# Altium PCB karmanDB.PcbDoc (part 2 of 2)
Units mil, origin at the board's own origin, x right, y up, seen from the top; angles counter-clockwise.
Board outline 6100 x 3250 mil, 4 copper layers (Top Layer, Ground Plane, Power Plane, Bottom Layer), stack 64.4 mil thick; 205 components, 131 nets, 669 pads, 419 vias.
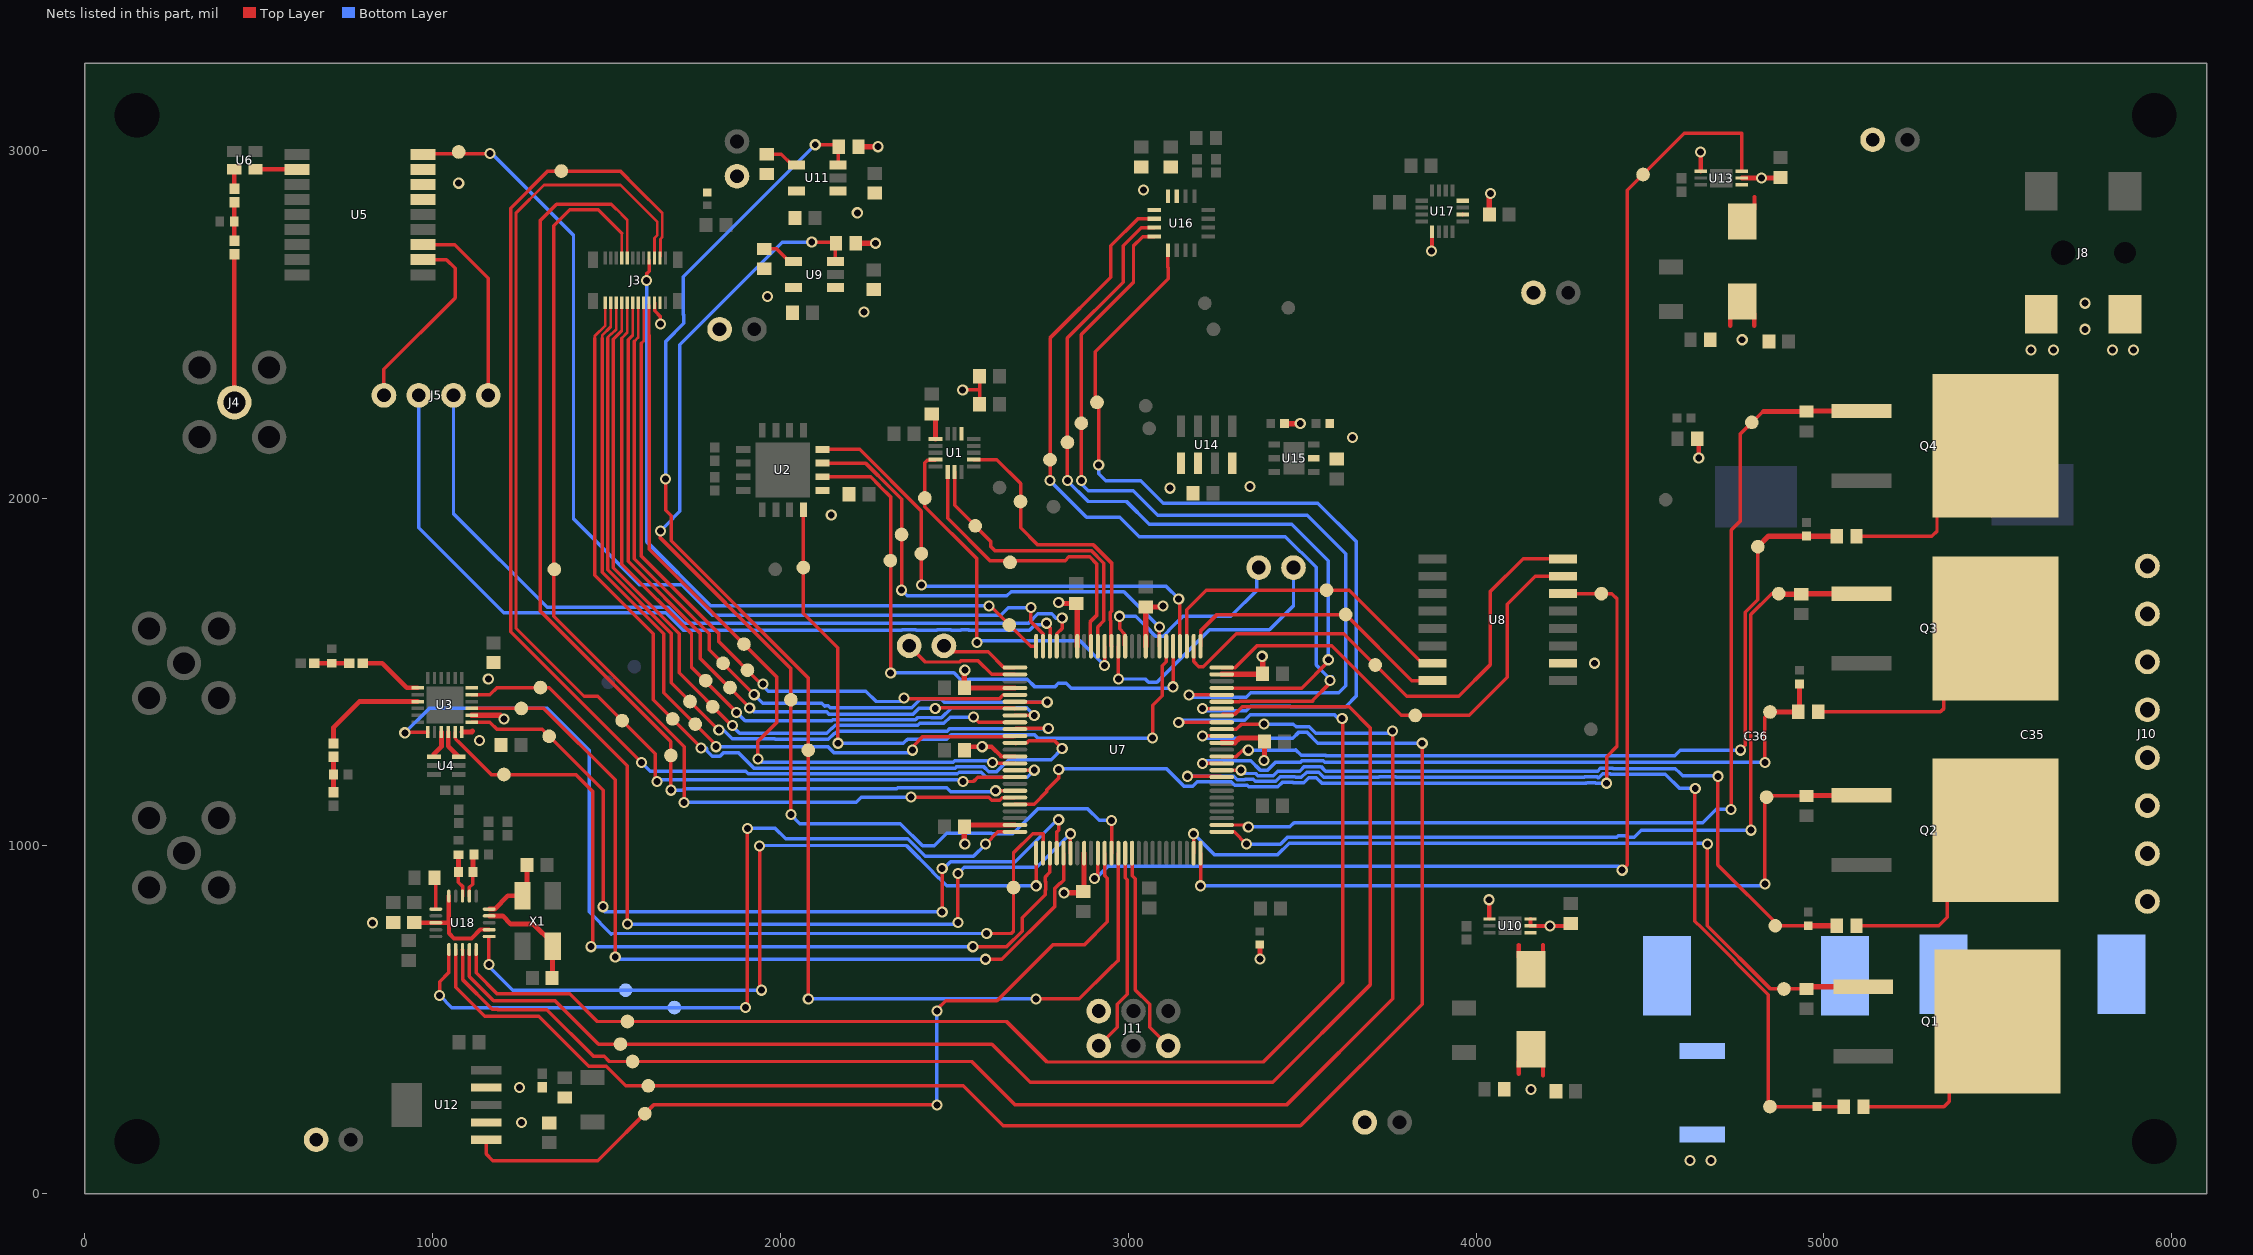
[diagram p4: the nets of this part, all layers, seen from the top]

## Via types
v1: diameter 32, hole 20, Top Layer to Bottom Layer, 416 vias
v2: diameter 30, hole 20, Top Layer to Bottom Layer, 2 vias
v3: diameter 32, hole 20, Top Layer to Bottom Layer, tented top, 1 vias

## Nets (pads, with @x,y where several pads share a name; then routed paths per layer and width w, separated by ;. In a path a pad name is that pad's centre, name@x,y a point inside that pad or via, vN(x,y) a via of type N, cw(c..) or ccw(c..) an arc to the next point about the centre after c; other vN are vias at no path point) (continued)
NetJ4_PIN: J4.PIN Z7.1 | length 425.7
  Top Layer w13.68: J4.PIN@430,2275 Z7.1@430,2700.71
NetL5_2: L5.2 U10.1 | length 69.7
  Top Layer w12: L5.2@4122.52,680.16 4122.52,715 ; L5.2@4192.52,680.16 4192.52,715
NetL6_2: L6.2 U13.1 | length 34.8
  Top Layer w12: L6.2@4800,2830.16 4800,2865
NetL7_1: L7.1 L8.2 U18.13 | length 123.5
  Top Layer w10: L8.2@1074.13,925 1074.13,895.87 1085.94,884.06 U18.13@1085.94,855.51
  Top Layer w14.34: L8.2@1074.13,925 L7.1@1074.13,974.13
NetL8_1: L8.1 L9.1 U18.12 | length 125.1
  Top Layer w10: U18.12@1105.63,855.51 1105.63,880.63 1115,890 L8.1@1115,924.13
  Top Layer w14.34: L8.1@1115,924.13 L8.1@1115.87,925 1115.87,971.73 L9.1@1119.13,975
NetR24_1: R24.1 U18.16 | length 95.4
  Top Layer w10: U18.16@1004.41,818.11 U18.16@1009.17,818.11 R24.1@1009.17,908.74
NetR25_1: R25.1 U9.4 | length 99.9
  Top Layer w10: R25.1@1953.03,2715.98 1989.49,2715.98 2025.63,2679.84 U9.4@2037.99,2679.84
NetR26_1: R26.1 U11.4 | length 97.9
  Top Layer w10: R26.1@1960.9,2988.58 2002.36,2988.58 2033.5,2957.43 U11.4@2045.86,2957.43
NetU3_3: U3.3 U4.4 | length 79.8
  Top Layer w13.68: U4.4@1004.13,1256.18 1004.13,1264.13 1025.16,1285.16 U3.3@1025.16,1327.24
NetU3_4: U3.4 U4.3 | length 83.6
  Top Layer w13.68: U3.4@1044.84,1327.24 1044.84,1286.34 U4.3@1075,1256.18
NetU3_19: U3.19 Z4.1 | length 188.3
  Top Layer w13.68: Z4.1@799.29,1525 Z4.1@801.79,1522.5 ; Z4.1@801.79,1525 855,1525 925.79,1454.21 U3.19@957.24,1454.21
NetU3_21: U3.21 Z1.1 | length 319.1
  Top Layer w13.68: Z1.1@715,1294.29 715,1340 790,1415 957.09,1415 U3.21@957.24,1414.84
NetU5_11: U5.11 U6.2 | length 119.1
  Top Layer w13.68: U6.2@491.02,2945 491.1,2944.92 U5.11@610,2944.92 U5.11@609.92,2945
NetU6_1: U6.1 Z9.2 | length 55.7
  Top Layer w13.68: Z9.2@430,2889.29 U6.1@430,2945
NetZ1_2: Z1.2 Z2.2 Z3.1 | length 101.4
  Top Layer w13.68: Z3.1@715,1154.29 Z2.2@715,1205 Z1.2@715,1255.71
NetZ4_2: Z4.2 Z5.2 Z6.1 | length 101.4
  Top Layer w13.68: Z6.1@659.29,1525 Z5.2@710,1525 Z4.2@760.71,1525
NetZ7_2: Z7.2 Z8.2 Z9.1 | length 111.4
  Top Layer w13.68: Z7.2@430,2739.29 Z8.2@430,2795 Z9.1@430,2850.71
PDI_CLK: J11.6 U7.90 | length 597.4
  Top Layer w10: U7.90@3010.83,979.21 3010.83,914.17 3020,905 3020,585.67 3061.43,544.23 3061.43,478.57 J11.6@3115,425
PDI_DATA: J11.4 U7.89 | length 591
  Top Layer w10: J11.4@2915,425 2968.57,478.57 2968.57,544.23 2997.46,573.12 2997.46,902.26 2991.14,908.57 U7.89@2991.14,979.21
PF4_GPSRST_N: TP67.1 U5.9 U7.49 | length 2907
  Top Layer w10: U5.9@982.72,2988.23 984.49,2990 v1(1165,2990) ; v1(2720,1685) 2720,1645 2754.92,1610.08 U7.49@2754.92,1573.7
  Bottom Layer w10: v1(1165,2990) 1165,2995 1405,2755 1405,1940 1595,1750 1717.37,1750 1804.37,1663 2633,1663 2655,1685 v1(2720,1685)
PF5_MCLK: J3.16 TP65.1 U7.50 | length 2056.6
  Top Layer w10: v1(1615,2625) 1615,2645 1622.26,2652.26 1622.26,2682.9 J3.16@1622.7,2683.34 ; v1(2600,1690) 2603,1690 2719.3,1573.7 U7.50@2735.24,1573.7
  Bottom Layer w10: v1(1615,2625) 1615,1875 1800,1690 v1(2600,1690)
PH0: J3.1 TP45.1 U7.62 | length 2679.4
  Top Layer w8: 1466.19,2460 1466.19,2466.18 1496.5,2496.49 J3.1@1496.5,2560.87
  Top Layer w10: 1466.19,2460 1466.19,1777.81 1634,1610 1634,1419.62 v1(1771.81,1281.81) ; U7.62@2674.21,1296.14 2676.9,1293.46 2676.9,1297.05 2708.87,1297.05 2713.82,1302 2788,1302 v1(2810,1280)
  Bottom Layer w10: v1(1771.81,1281.81) 1785.95,1281.81 1788,1279.76 1788,1273.82 1803.82,1258 1826.18,1258 1835.18,1267 1879.82,1267 1923.82,1223 2502.19,1223 2507.19,1228 2583.82,1228 2598.82,1213 2621.18,1213 2656.18,1248 2778,1248 v1(2810,1280)
PH1: J3.2 TP47.1 U7.61 | length 2313.8
  Top Layer w8: 1487.41,2460 1487.41,2467.6 1512.24,2492.43 J3.2@1512.24,2560.87
  Top Layer w10: 1487.41,2460 1487.41,1786.59 1664,1610 1664,1440.53 1815,1289.53 v1(1815,1285) ; v1(2380,1275) 2380,1285 2408.05,1313.05 2671.43,1313.05 U7.61@2674.21,1315.83
  Bottom Layer w10: v1(1815,1285) 2136.82,1285 2153.82,1268 2373,1268 v1(2380,1275)
PH2: J3.3 TP49.1 U7.60 | length 2445.1
  Top Layer w8: 1503.41,2460 1504.41,2461 1504.41,2462.69 1513.19,2471.48 1514.61,2471.48 1527.99,2484.87 J3.3@1527.99,2560.87
  Top Layer w10: 1503.41,2460 1503.41,1793.22 1686,1610.63 1686,1469.44 v1(1822.72,1332.72) ; U7.60@2674.21,1335.51 2676.99,1338.29 2768.97,1338.29 v1(2770,1337.26)
  Bottom Layer w10: v1(1822.72,1332.72) 1836.86,1332.72 1861.58,1308 1983,1308 1985,1306 2137.82,1306 2153.82,1322 2155.23,1322 2163.23,1330 2479.14,1330 2485.14,1336 2756.74,1336 2762.74,1330 v1(2770,1337.26)
PH3: J3.4 TP51.1 U7.59 | length 2230.3
  Top Layer w8: 1519.41,2456.48 1543.74,2480.81 J3.4@1543.74,2560.87
  Top Layer w10: 1519.41,2456.48 1519.41,1799.85 1709,1610.25 1709,1497.35 1860.72,1345.63 v1(1862.14,1345.63) ; v1(2555,1370) 2569.8,1355.2 U7.59@2674.21,1355.2
  Bottom Layer w10: v1(1862.14,1345.63) 1860.72,1345.63 1856.35,1350 1882.35,1324 2133.19,1324 2147.19,1338 2148.6,1338 2157.6,1347 2394.88,1347 2400.88,1353 2426.19,1353 2427.19,1352 2469.63,1352 2487.63,1370 v1(2555,1370)
PH4: J3.5 TP53.1 U7.58 | length 2267.3
  Top Layer w8: 1544.14,2460 1559.49,2475.35 J3.5@1559.49,2560.87
  Top Layer w10: 1544.14,2460 1544.14,1810.09 1744.23,1610 1744.23,1513.03 v1(1873.63,1383.63) ; U7.58@2674.21,1374.88 v1(2729.65,1374.88)
  Bottom Layer w10: v1(1873.63,1383.63) 1898.03,1359.23 2147.21,1359.23 2150.98,1363 2388.26,1363 2394.25,1369 2432.82,1369 2433.82,1368 2463,1368 2492,1397 2707.53,1397 v1(2729.65,1374.88)
PH5: J3.6 TP55.1 U7.57 | length 2092.2
  Top Layer w8: 1562.36,2455 1575.24,2467.88 J3.6@1575.24,2560.87
  Top Layer w10: 1562.36,2455 1562.36,1817.64 1770,1610 1770,1538.18 v1(1911.63,1396.54) ; v1@2445,1396 2446,1397 2671.78,1397 U7.57@2674.21,1394.57
  Bottom Layer w10: v1(1911.63,1396.54) 1923.18,1385 2133,1385 2139,1379 2154,1379 2381.63,1379 2397.63,1395 v1(2445,1395)
PH6: J3.7 TP56.1 U7.56 | length 2240.1
  Top Layer w8: 1580.04,2450 1590.98,2460.95 J3.7@1590.98,2560.87
  Top Layer w10: 1580.04,2450 1580.04,1824.96 1795,1610 1795,1564.09 v1(1924.54,1434.54) ; U7.56@2674.21,1414.25 2675.47,1413 v1(2767,1413)
  Bottom Layer w10: v1(1924.54,1434.54) 1949.09,1410 2118.59,1410 2126.98,1401.61 2128.44,1403.07 2137.56,1403.07 2143.56,1397.07 2377.07,1397.07 2402,1422 2462,1422 2471,1413 v1(2767,1413)
PH7: J3.8 TP58.1 U7.55 | length 1999.5
  Top Layer w8: 1600,2445 1606.73,2451.73 J3.8@1606.73,2560.87
  Top Layer w10: 1600,2445 1600,1833.23 1823.23,1610 1823.23,1586.77 1945,1465 v1(1950,1465) ; v1(2355,1425) 2356.67,1423.33 2629.86,1423.33 2640.46,1433.94 U7.55@2674.21,1433.94
  Bottom Layer w10: v1(1950,1465) 1950,1460 1965,1445 2245,1445 2275,1415 v1@2355,1415
PJ0_PCLK: J3.9 TP42.1 U7.65 | length 2227.2
  Top Layer w8: 1622.26,2467.26 J3.9@1622.26,2554.21
  Top Layer w10: 1622.26,2467.26 1622.26,1852.74 1990,1485 1990,1355 1935,1300 v1(1935,1250) ; v1(2610,1240) 2612.91,1237.09 U7.65@2674.21,1237.09
  Bottom Layer w10: v1(1935,1250) 1945,1240 2496.56,1240 2500.56,1244 2606,1244 v1(2610,1240)
PJ1_VSYNC: J3.14 TP40.1 U7.66 | length 3621.3
  Top Layer w8: 1586.97,2891.97 1660,2818.95 1660,2749.85 1655,2744.85 J3.14@1655,2694.01
  Top Layer w10: 1586.97,2891.97 1538.95,2940 1331.05,2940 1224.5,2833.45 1224.5,1615.5 v1(1600,1240) ; U7.66@2674.21,1217.4 v1(2729.65,1217.4)
  Bottom Layer w10: v1(1600,1240) 1626,1214 1900.19,1214 1907.19,1207 2508.82,1207 2513.82,1212 2546.18,1212 2577.19,1212 2592.19,1197 2709.24,1197 v1(2729.65,1217.4)
PJ2_HSYNC: J3.15 TP39.1 U7.67 | length 3451.8
  Top Layer w8: 1558.69,2881.31 1646,2794 1646,2755.64 1638.23,2747.87 J3.15@1638.23,2690
  Top Layer w9: 1558.69,2881.31 1540,2900 1320,2900 1240,2820 1240,1625 1435,1430 1475,1430 TP39.1@1545,1360 1640,1265 1640,1190 v1(1645,1185)
  Top Layer w10: v1(2525,1185) 2555,1185 2567.72,1197.72 U7.67@2674.21,1197.72
  Bottom Layer w9: v1(1645,1185) 1650,1190 2508.94,1190 v1@2519.44,1179.5
PJ4_RESET: J3.20 TP36.1 U7.69 | length 3189.4
  Top Layer w8: 1526.87,2831.87 1559.49,2799.25 J3.20@1559.49,2690
  Top Layer w10: 1526.87,2831.87 1513.74,2845 1356.26,2845 1310,2798.74 1310,1675 1685,1300 v1(1685,1160) ; v1(2618.78,1158.35) U7.69@2674.21,1158.35
  Bottom Layer w10: v1(1685,1160) 1719,1160 1723,1164 2334,1164 2337,1167 2478,1167 2490,1155 2615.43,1155 v1(2618.78,1158.35)
PJ5_STANDBY: J3.21 TP34.1 U7.70 | length 3091.5
  Top Layer w8: J3.21@1543.74,2690 1543.74,2761.26
  Top Layer w10: 1543.74,2761.26 1476,2829 1394,2829 1348,2783 1348,1659.63 1723,1284.63 v1(1723,1125) ; v1(2375,1140) 2598.94,1140 2607.6,1131.35 2629.96,1131.35 2637.28,1138.66 U7.70@2674.21,1138.66
  Bottom Layer w10: v1(1723,1125) 2217.37,1125 2232.37,1140 v1(2375,1140)
PYRO1_PA4: Q1.1 R13.1 TP4.1 U7.99 | length 2321.5
  Top Layer w10: U7.99@3187.99,979.21 3187.99,1021.39 v1(3187.99,1034.65) ; v1(4665,1005) 4665,770 4846.46,588.54 R13.1@4950,588.54 R13.1@4956.46,595
  Top Layer w15: R13.1@4956.46,595 Q1.1@5112.88,595
  Bottom Layer w10: v1(3187.99,1034.65) 3247.64,975 3430.26,975 3463.26,1008 v1@4655,1008
PYRO1_SENSE: R9.2 R11.1 TP17.1 U7.9 | length 2844.1
  Top Layer w10: v1(3170,1200) 3266.42,1200 U7.9@3268.7,1197.72 ; v1(4630,1165) 4630,1173 4629,1174 4629,783.37 4648.37,764 4840,572.37 4840,255 TP17.1@4844.69,250.32 R11.1@4980,250.32 5056.14,250.32 R9.2@5056.46,250
  Bottom Layer w10: v1(3170,1200) 3170.35,1200.35 3303.01,1200.35 3312.95,1190.4 3335.32,1190.4 3336.92,1192 3359.56,1192 3365.56,1186 3423.63,1186 3436.63,1199 3478.86,1199 3480.86,1197 3497.6,1197 3512.6,1212 3547.4,1212 3562.4,1197 3719.98,1197 3720.98,1198 3769.02,1198 3770.02,1197 4311.19,1197 4312.19,1198 4347.81,1198 4349.81,1196 4352.82,1196 4363.82,1207 4386.18,1207 4387.18,1206 4544,1206 4585,1165 v1(4630,1165)
PYRO2_PA5: Q2.1 R14.1 TP5.1 U7.100 | length 2243.7
  Top Layer w10: v1(3207.68,885.17) U7.100@3207.68,979.21 ; v1(4830,890) 4830,1132.09 4841.46,1143.54 R14.1@4950,1143.54 R14.1@4951.46,1145
  Top Layer w15: R14.1@4951.46,1145 Q2.1@5107.88,1145
  Bottom Layer w10: v1(3207.68,885.17) 4825.17,885.17 v1(4830,890)
PYRO2_SENSE: R10.2 R12.1 TP19.1 U7.10 | length 2130.6
  Top Layer w10: U7.10@3268.7,1217.4 v1(3324.13,1217.4) ; v1(4695,1200) 4695,945 4869.69,770.32 R12.1@4955,770.32
  Top Layer w15: R12.1@4955,770.32 5036.14,770.32 R10.2@5036.46,770
  Bottom Layer w10: v1(3324.13,1217.4) 3333.54,1208 3366.19,1208 3372.19,1202 3417,1202 3430,1215 3492.98,1215 3505.98,1228 3554.03,1228 3567.03,1215 4349.19,1215 4357.19,1223 4392.81,1223 4393.81,1222 4573,1222 4585,1210 4594,1201 4626.63,1201 4694,1201 v1(4695,1200)
PYRO3_PA6: Q3.1 R19.1 TP6.1 U7.1 | length 2519.8
  Top Layer w10: U7.1@3268.7,1040.24 3304.76,1040.24 3304.53,1040 3339.53,1005 v1(3340,1005) ; v1(4790,1045) 4790,1665 4850,1725 4875,1725 TP6.1@4876.46,1723.54 ; R19.1@4935,1723.54 R19.1@4936.46,1725
  Top Layer w15: TP6.1@4876.46,1723.54 R19.1@4935,1723.54 ; R19.1@4936.46,1725 Q3.1@5107.88,1725
  Bottom Layer w10: v1(3340,1005) 3437.63,1005 3457.63,1025 4404.7,1025 4408.2,1028.5 4431.81,1028.5 4435.31,1025 4455,1025 4475,1045 v1(4790,1045)
PYRO3_SENSE: R15.2 R17.1 TP21.1 U7.11 | length 2013
  Top Layer w10: v1(3213.27,1237.09) U7.11@3268.7,1237.09 ; v1(4830,1240) 4830,1370 TP21.1@4845,1385
  Top Layer w15: TP21.1@4845,1385 R15.2@4926.46,1385 4930,1388.54 R17.1@4930,1465.32
  Bottom Layer w10: v1(3213.27,1237.09) 3220.58,1244.4 3352.41,1244.4 3378.82,1218 3401.18,1218 3423.18,1240 3495.35,1240 3499.35,1244 3560.65,1244 3564.65,1240 v1(4830,1240)
PYRO4_PA7: Q4.1 R20.1 TP8.1 U7.2 | length 2959.3
  Top Layer w10: U7.2@3268.7,1059.92 3347.39,1059.92 3345,1057.53 v1(3345,1054.4) ; v1(4733,1105) 4733,1908 4760,1935 4760,2185 4825,2250 ; R20.1@4950,2248.54 R20.1@4951.46,2250
  Top Layer w15: 4826.46,2248.54 R20.1@4950,2248.54 ; R20.1@4951.46,2250 Q4.1@5107.88,2250
  Bottom Layer w10: v1(3345,1054.4) 3464.4,1054.4 3476.5,1066.5 4651.5,1066.5 4690,1105 v1(4733,1105)
PYRO4_SENSE: R16.2 R18.1 TP23.1 U7.12 | length 2358.6
  Top Layer w10: U7.12@3268.7,1256.77 3310.88,1256.77 3330.11,1276 3331.11,1275 v1(3345,1275) ; v1(4760,1275) 4774,1289 4774,1671.63 4810,1707.63 TP23.1@4810,1860
  Top Layer w15: TP23.1@4810,1860 4840.32,1890.32 R18.1@4950,1890.32 5036.14,1890.32 R16.2@5036.46,1890
  Bottom Layer w10: v1(3345,1275) 3479.82,1275 3480.82,1276 3496.82,1260 3567.28,1260 3568.28,1259 4570.77,1259 4586.77,1275 v1(4760,1275)
PYRO_FET1: J10.2 Q1.2 R9.1 | length 540.1
  Top Layer w10: R9.1@5113.54,250 5345,250 5360,265 5360,356.3 Q1.2@5498.7,495
PYRO_FET2: J10.4 Q2.2 R10.1 | length 579.3
  Top Layer w10: R10.1@5093.54,770 5330,770 5355,795 5355,906.3 Q2.2@5493.7,1045
PYRO_FET3: J10.6 Q3.2 R15.1 | length 657.2
  Top Layer w10: R15.1@4983.54,1385 5335,1385 5345,1395 5345,1476.3 Q3.2@5493.7,1625
PYRO_FET4: J10.8 Q4.2 R16.1 | length 552.5
  Top Layer w10: R16.1@5093.54,1890 5310,1890 5325,1905 5325,1981.3 Q4.2@5493.7,2150
RFE_ANT_SEL: TP24.1 U3.1 U7.77 | length 2789.9
  Top Layer w10: v1(920,1325) 922.24,1327.24 U3.1@985.79,1327.24 ; v1@2582,748 2663,748 2670,755 2670,980 2725,1035 2740,1035 2740.36,1034.65 2754.92,1034.65 U7.77@2754.92,979.21
  Bottom Layer w10: v1(920,1325) 990,1395 1330,1395 1450,1275 1450,810 1514,746 1516,748 v1(2593,748)
RFE_CPS: TP16.1 U3.11 U7.81 | length 2522.6
  Top Layer w10: U3.11@1112.76,1434.53 1164.53,1434.53 1185,1455 1335,1455 1560,1230 v1(1560,775) ; v1(2510,780) v1(2510,920) ; U7.81@2833.66,979.21 v1(2833.66,1034.65)
  Bottom Layer w10: v1(1560,775) 2505,775 v1(2510,780) ; v1(2510,920) 2528,938 2737.02,938 v1(2833.66,1034.65)
RFE_CRX: TP22.1 U3.5 U7.78 | length 2443.3
  Top Layer w10: U3.5@1064.53,1327.24 1064.53,1308.78 1068.29,1305.02 ; 1068.29,1304.97 1074.74,1298.53 ; 1074.79,1298.53 1168.31,1205 TP22.1@1205,1205 1411.77,1205 1461,1155.77 1461,716 v1(1455,710) ; v1(2552.98,710) 2650,710 2695,755 2695,792.94 2761.24,859.17 2761.24,872.99 2762.24,873.99 2762.24,896.36 2761.24,897.36 2761.24,910.41 2774.61,923.78 U7.78@2774.61,979.21
  Bottom Layer w10: v1(1455,710) v1(2552.98,710)
RFE_CSD: TP20.1 U3.7 U7.79 | length 2396.6
  Top Layer w10: U3.7@1112.76,1355.79 1164.21,1355.79 1185,1335 1315,1335 1490,1160 v1(1490,825) ; v1(2465,810) v1(2465,935) ; U7.79@2794.29,979.21 2795,979.92 2795,1040 2800,1045 v1(2800,1075)
  Bottom Layer w10: v1(1490,825) 1490,815 1495,810 v1(2465,810) ; v1(2465,935) 2470,935 2489,954 2675.04,954 2796.04,1075 v1(2800,1075)
RFE_CTX: TP18.1 U3.9 U7.80 | length 2500.8
  Top Layer w10: U3.9@1112.76,1395.16 1254.84,1395.16 TP18.1@1255,1395 1320,1395 1525,1190 v1(1525,680) ; v1(2589,674) 2636.63,674 2788,825.37 2788,876.18 2803.82,892 2805.23,892 2813.98,900.75 2813.98,937.04 U7.80@2813.98,979.21
  Bottom Layer w10: v1(1525,680) 1531,674 v1(2589,674)
RXD_CON: J7.2 U7.51 | length 230
  Top Layer w10: J7.2@2470,1575 2487,1558 2597,1558 2642.32,1512.68 U7.51@2674.21,1512.68
SPIC0_SS: TP26.1 U7.15 U18.2 | length 4656.6
  Top Layer w10: U18.2@1066.26,701.97 1066.26,593.74 1150,510 1305,510 1448.37,366.63 1499.01,366.63 1555.64,310 2525,310 2640,195 3495,195 3845,545 v1(3845,1295) ; v1(3213.27,1315.83) U7.15@3268.7,1315.83
  Bottom Layer w10: v1(3213.27,1315.83) 3219.58,1309.51 3472.74,1309.51 3489.23,1326 3514,1326 3545,1295 v1(3845,1295)
SPIC1_SCK: TP28.1 U7.16 U18.3 | length 4317.9
  Top Layer w10: U18.3@1085,701.02 U18.3@1085.94,701.97 1085.94,615.74 1171.68,530 1186.6,530 1187.6,529 1328.43,529 1462.43,395 1493.26,395 1508.26,380 2550,380 2675,255 3455,255 3760,560 v1(3760,1330) ; U7.16@3268.7,1335.51 3310.88,1335.51 3325.37,1350 v1(3390,1350)
  Bottom Layer w10: v1(3390,1350) 3474.6,1350 3482.6,1342 3520.63,1342 3538.63,1324 3754,1324 v1(3760,1330)
SPIC2_MISO: TP29.1 U7.17 U18.5 | length 4141.7
  Top Layer w10: U18.5@1125.31,701.97 1125.31,634.69 1185,575 1393.75,575 1473.75,495 2650,495 2766.43,378.57 3388.57,378.57 3617,607 3617,1364.22 v1(3615,1366.22) ; v1(3145,1355) 3268.5,1355 U7.17@3268.7,1355.2
  Bottom Layer w10: v1(3145,1355) 3151.51,1361.51 3334.9,1361.51 3350.39,1377 3593,1377 3612,1358 v1@3620,1358 ; v1@3615,1360 v1(3615,1366.22)
SPIC3_MOSI: TP31.1 U7.18 U18.4 | length 4110.6
  Top Layer w10: U18.4@1105.63,701.97 1105.63,624.37 1175,555 1351.92,555 1476.92,430 2608.18,430 2718.18,320 3415,320 3695,600 3695,1340 3635,1400 3327.57,1400 3305.23,1377.66 3271.48,1377.66 U7.18@3268.7,1374.88
SPIC4_SS: TP33.1 U7.19 U16.5 | length 2518.4
  Top Layer w10: v1(2915,2095) 2915,2270 2905,2280 2905,2420 3115,2630 3115,2662.74 3113.87,2663.87 3113.87,2712.08 U16.5@3113.7,2712.24 ; v1(3213.27,1394.57) U7.19@3268.7,1394.57
  Bottom Layer w10: v1(2915,2095) 2915,2070 2935,2050 3035.77,2050 3100.77,1985 3545,1985 3656,1874 3656,1431 3625,1400 3466.77,1400 3465.77,1401 3351.77,1401 3339.02,1388.25 3219.58,1388.25 v1(3213.27,1394.57)
SPIC5_SCK: TP35.1 U7.20 U16.2 | length 2455.2
  Top Layer w10: v1(2775,2050) TP35.1@2775,2110 2775,2460 2950,2635 2950,2725 3027.8,2802.8 U16.2@3074.33,2802.8 ; U7.20@3268.7,1414.25 3319.2,1414.25 3320.94,1416 3530,1416 3530,1418.23 3580,1468.23 v1(3580,1475)
  Bottom Layer w10: v1(2775,2050) 2880,1945 2975,1945 3031,1889 3451.67,1889 3540,1800.67 3540,1520 3573.39,1486.62 v1@3586.62,1486.62
SPIC6_MISO: TP37.1 U7.21 U16.4 | length 2614
  Top Layer w10: v1(2865,2050) TP37.1@2865,2215 2865,2470 3015,2620 3015,2660 3015,2725 3041.62,2751.61 U16.4@3074.33,2751.61 ; v1(3174.66,1433.94) U7.21@3268.7,1433.94
  Bottom Layer w10: v1(2865,2050) 2855.55,2050 2884.55,2021 3014,2021 3085,1950 3515,1950 3625,1840 3625,1460 3605,1440 3373.76,1440 3373.51,1440.25 3351.97,1440.25 3339.34,1427.62 3180.98,1427.62 v1(3174.66,1433.94)
SPIC7_MOSI: TP38.1 U7.22 U16.3 | length 2325.4
  Top Layer w10: v1(2825,2050) TP38.1@2825,2160 2825,2460 2985,2620 2985,2725 3037.21,2777.21 U16.3@3074.33,2777.21 ; U7.22@3268.7,1453.62 3498.62,1453.62 3575,1530 v1(3575,1535)
  Bottom Layer w10: v1(2825,2050) 2885,1990 2995,1990 3060,1925 3470,1925 3575,1820 v1(3575,1535)
SPID0_CS1: TP41.1 U7.25 U8.7 | length 1378.7
  Top Layer w10: U7.25@3268.7,1512.68 3307.68,1512.68 3370,1575 3585,1575 3785,1375 3980,1375 4090,1485 4090,1695 4170,1775 U8.7@4250,1775
SPID1_SCK: TP43.1 U7.26 U8.16 | length 808.6
  Top Layer w10: U7.26@3207.68,1573.7 3207.68,1617.68 3255,1665 TP43.1@3625,1665 3815,1475 U8.16@3874.02,1475
SPID2_MISO: TP44.1 U7.27 U8.8 | length 1512.4
  Top Layer w10: U7.27@3187.99,1573.7 3187.99,1530.05 3203.04,1515 3215,1515 3310,1610 3620,1610 3800,1430 3950,1430 4040,1520 4040,1730 4135,1825 U8.8@4250,1825
SPID3_MOSI: TP46.1 U7.28 U8.15 | length 921.4
  Top Layer w10: U7.28@3168.31,1573.7 3168.31,1679.31 3224,1735 3635,1735 3845,1525 U8.15@3874.02,1525
SPID4_SS: TP48.1 U2.12 U7.29 | length 1463.2
  Top Layer w10: U2.12@2120.95,2139.92 2227.71,2139.92 2405,1962.63 v1(2405,1750) ; v1(3145,1710) 3148.62,1706.38 U7.29@3148.62,1573.7
  Bottom Layer w10: v1@2405,1747 3108,1747 v1(3145,1710)
SPID5_SCK: TP50.1 U2.10 U7.30 | length 1684.1
  Top Layer w10: U2.10@2120.95,2061.18 2259.18,2061.18 2284.27,2036.09 2284.27,2035.73 2317,2003 v1(2317,1497) ; v1(3128.94,1457.23) U7.30@3128.94,1573.7
  Bottom Layer w10: v1(2317,1497) 2318,1498 2498.82,1498 2518.82,1478 2541.18,1478 2542.18,1479 2709.23,1479 2730.23,1458 2789.82,1458 2798.82,1467 2821.18,1467 2835.52,1452.66 3124.37,1452.66 v1(3128.94,1457.23)
SPID6_MISO: TP52.1 U2.8 U7.31 | length 1913.5
  Top Layer w10: U2.8@2065.83,1966.69 2065.83,1669.17 2165,1570 v1(2165,1295) ; v1(3070,1310) 3070,1404.47 3097.46,1431.92 3097.46,1517.99 3109.25,1529.78 U7.31@3109.25,1573.7
  Bottom Layer w10: v1(2165,1295) 2353.23,1295 2365.23,1307 2431.18,1307 2432.18,1306 2477.77,1306 2491.77,1320 2730,1320 2740.49,1309.51 2779.02,1309.51 2779.51,1310 v1(3070,1310)
SPID7_MOSI: TP54.1 U2.11 U7.32 | length 1382.6
  Top Layer w10: U2.11@2120.95,2100.55 2244.45,2100.55 2320,2025 2348.23,1996.77 v1(2348.23,1735) ; U7.32@3089.57,1573.7 3089.57,1615.88 v1(3089.57,1629.13)
  Bottom Layer w10: v1(2348.23,1735) 2364.23,1719 2651,1719 2663,1731 2987.7,1731 v1(3089.57,1629.13)
SPIE4_SS: TP64.1 U1.10 U7.39 | length 836.4
  Top Layer w10: U1.10@2555.87,2110.32 2622.31,2110.32 2691,2041.63 2691,1914 2740,1865 2900,1865 2951.77,1813.23 2951.77,1674.96 2948,1671.18 2948,1648.82 2949,1647.82 2949,1576.47 U7.39@2951.77,1573.7
SPIE5_SCK: TP66.1 U1.4 U7.40 | length 1065.3
  Top Layer w10: U1.4@2445.63,2110.32 2445.63,2109.13 2422.98,2109.13 2414.95,2101.09 2414.95,1975.31 2565,1825.26 v1(2565,1585) ; v1(2932.09,1518.27) U7.40@2932.09,1573.7
  Bottom Layer w10: v1@2565,1589 2861.36,1589 v1(2932.09,1518.27)
SPIE6_MISO: TP68.1 U1.7 U7.41 | length 848.8
  Top Layer w10: U1.7@2500.75,2074.88 2500.75,1979.25 2604,1876 2604,1861 2616,1849 2893.37,1849 2930,1812.37 2930,1646.73 2912.4,1629.13 U7.41@2912.4,1573.7
SPIE7_MOSI: TP70.1 U1.6 U7.42 | length 866.6
  Top Layer w10: U1.6@2481.06,2074.88 2481.06,1941.31 2602.37,1820 2818.23,1820 2829.23,1831 2888.75,1831 2908.69,1811.06 2908.69,1662.19 2890.03,1643.53 U7.42@2890.03,1576.48
SPIJ6_CS2: TP32.1 U7.71 U8.6 | length 2521.3
  Top Layer w10: U7.71@2674.21,1118.98 2728.17,1118.98 2732.19,1123 2733,1123 2765,1155 2765,1160 2800,1195 v1(2800,1220) ; U8.6@4250,1725 4390,1725 4405,1710 4405,1286.65 4375,1256.65 v1(4375,1180)
  Bottom Layer w10: v1@2795.23,1220 2796.23,1221 3110.82,1221 3160.1,1171.72 3185.43,1171.72 3198.06,1184.35 3296.38,1184.35 3306.32,1174.4 3341.95,1174.4 3346.35,1170 3430.26,1170 3443.26,1183 3472.23,1183 3474.23,1181 3504.23,1181 3519.23,1196 3540.77,1196 3556.77,1180 4316.82,1180 4318.82,1182 4341.18,1182 4343.18,1180 v1(4375,1180)
TRX_EN: TP27.1 U7.75 U18.1 | length 2386.1
  Top Layer w10: v1(1020,570) 1020,609.25 1046.57,635.83 U18.1@1046.57,701.97 U18.1@1046.65,701.89 ; v1(1900,535) 1905,540 v1(1905,1050) ; v1(2590,1005) 2625.24,1040.24 U7.75@2674.21,1040.24
  Bottom Layer w10: v1(1020,570) 1055,535 v1(1900,535) ; v1(1905,1050) 1985.39,1050 2015.39,1020 2365.86,1020 2415.86,970 2555,970 v1(2590,1005)
TRX_INT: TP25.1 U7.76 U18.6 | length 2263.7
  Top Layer w10: v1(1161.65,658.35) 1161.65,738.31 U18.6@1162.72,739.37 ; v1(1940,1000) 1940,580 v1(1945,585) ; v1(2735.24,885.17) U7.76@2735.24,979.21
  Bottom Layer w10: v1(1161.65,658.35) 1161.65,653.35 1230,585 v1(1945,585) ; v1(1940,1000) 1941,1001 2362.23,1001 2438,925.23 2438,923.82 2453.82,908 2455.23,908 2478.06,885.17 v1(2735.24,885.17)
TXD_CON: J7.1 U7.52 | length 341
  Top Layer w10: J7.1@2370,1575 2416.43,1528.57 2515.38,1528.57 2518.82,1532 2568,1532 2607.01,1492.99 U7.52@2674.21,1492.99
UARTE2_RXD: J6.2 U7.37 | length 635.7
  Top Layer w10: v1(2975,1660) 2975,1623.59 2988.36,1610.23 2988.36,1576.48 U7.37@2991.14,1573.7
  Bottom Layer w10: v1(2975,1660) 3021.93,1660 3062.57,1619.37 3062.57,1617.95 3078.38,1602.13 3100.75,1602.13 3116.57,1617.95 3116.57,1619.37 3157.2,1660 3295,1660 3370,1735 3370,1795 J6.2@3375,1800
UARTE3_TXD: J6.1 U7.38 | length 802.7
  Top Layer w10: v1(2971.46,1479.66) U7.38@2971.46,1573.7
  Bottom Layer w10: v1(2971.46,1479.66) 3048.57,1479.66 3058.23,1470 3082.51,1470 3233.51,1621 3406,1621 3475,1690 J6.1@3475,1800
UARTF2_RXD: J5.3 U7.47 | length 2332.4
  Top Layer w10: U7.47@2794.29,1573.7 2794.29,1609.29 2810,1625 v1(2810,1655)
  Bottom Layer w10: J5.3@1060,2295 1060,1955 1329,1686 1676.63,1686 1722.63,1640 2713.23,1640 2740.23,1667 2779.77,1667 2791.77,1655 v1(2810,1655) v1@2810,1647
UARTF3_TXD: J5.2 U7.48 | length 2379.9
  Top Layer w10: v1(2765,1640) 2765,1636.35 2775,1626.35 U7.48@2775,1590
  Bottom Layer w10: J5.2@960,2295 960,1915 1205,1670 1670,1670 1720,1620 2349.33,1620 2350.77,1621.43 2389.23,1621.43 2390.67,1620 2449.33,1620 2450.77,1621.43 2489.23,1621.43 2490.67,1620 2518.23,1620 2519.23,1621 2540.77,1621 2541.77,1620 2715.86,1620 2730.86,1635 2755,1635 2765,1645 v1(2765,1640)
UBLOX_RXD: J5.4 U5.3 | length 564.6
  Top Layer w10: U5.3@972.21,2728.39 1063.39,2728.39 1160,2631.77 J5.4@1160,2295
UBLOX_TXD: J5.1 U5.2 | length 553.1
  Top Layer w10: J5.1@860,2295 860,2370 1065,2575 1065,2660 1039.92,2685.08 U5.2@972.21,2685.08
V_CAM3_EN: R6.2 TP7.1 U7.88 U11.3 | length 4185.6
  Top Layer w10: v1(1670,2055) 1670,1965 1685.63,1949.37 1685.63,1877 2080,1482.63 v1(2080,560) ; v1(2100,3015.63) 2172.96,3015.63 R6.2@2167.36,3010.03 ; U11.3@2165.94,2957.43 R6.2@2165.94,3008.62 ; v1(2735,560) 2859.33,560 2946.1,646.77 2969.33,670 2971.46,670 U7.88@2971.46,979.21
  Bottom Layer w10: v1(1670,2055) 1670,2450 1722,2502 1722,2526.18 1721,2527.18 1721,2636.63 v1(2100,3015.63) v1@2100,3012.71 ; v1(2080,560) v1(2735,560)
V_CAM18_EN: R4.2 TP9.1 U7.87 U9.3 | length 3270.3
  Top Layer w10: v1(1655,1905) 1655,1885 2030,1510 v1(2030,1090) ; v1(2090,2735.63) 2162.68,2735.63 R4.2@2159.49,2732.44 ; U9.3@2158.07,2679.84 R4.2@2158.07,2731.02 ; U7.87@2951.77,979.21 v1(2951.77,1073.25)
  Bottom Layer w10: v1(1655,1905) 1674,1924 1674,1924.77 1711,1961.77 1711,2441 2005.63,2735.63 v1(2090,2735.63) ; v1(2030,1090) 2056,1064 2344.49,1064 2408.49,1000 2441.77,1000 2477.77,1036 2605.77,1036 2606.77,1035 2668.23,1035 2739.23,1106 2884,1106 2916.75,1073.25 v1(2951.77,1073.25)
V_RADIO_EN: TP10.1 U7.86 U12.1 | length 2480.8
  Top Layer w10: U12.1@1154.17,155 1154.17,114.17 1173.35,95 1475,95 1635,255 v1(2450,255) ; v1(2450,525) 2450,530 2475,555 2622.5,555 2782.5,715 2873.18,715 2940,781.82 2940,906.77 2932.09,914.68 U7.86@2932.09,979.21
  Bottom Layer w10: v1(2450,255) v1(2450,525)
V_SENS: C1.1 C2.1 C3.1 C24.1 C27.1 C31.1 C37.1 C38.1 C39.1 C40.1 C41.1 J13.1 L6.1 R4.1 R5.1 R6.1 R21.1 R22.1 U1.14 U2.9 U5.6 U5.7 U5.8 U9.1 U11.1 U13.4 U14.1 U14.2 U14.4 U15.5 U16.1 U16.15 U16.16 U17.2 U17.4 U17.13 | length 518.8
  Top Layer w10: v1(2524,2311) 2571.91,2311 ; C3.1@2572.91,2270 C2.1@2572.91,2350 ; U17.2@3961.97,2815.16 U17.2@3962.13,2815
  Top Layer w12: v1@3873.39,2711.93 U17.13@3873.39,2765.95
  Top Layer w13: U13.4@4646.14,2939.69 v1@4646.14,2992.6 ; 4730,2495 L6.1@4730,2529.84 ; 4800,2495 L6.1@4800,2529.84
  Top Layer w15: R4.1@2216.57,2732.44 v1(2273.03,2732.44) ; R6.1@2224.45,3010.03 v1(2280.9,3010.03) ; R22.1@3449.37,2213.43 v1@3494.06,2213.43 ; C41.1@4037.91,2815 v1@4037.91,2871.46
  other v1: 2146.02,1950.87 3120,2028.15 3350,2033.15 3644.37,2173.74 3494.37,2213.74 4765,2455 2240,2535 3871.46,2710 2220.9,2820.03 4041.46,2875 3043.54,2885 1075,2905 4645,2995
V_SENS_EN: TP12.1 U7.85 U13.3 | length 4082.8
  Top Layer w10: v1(2903,906.03) 2906.03,906.03 2912.4,912.4 U7.85@2912.4,979.21 ; v1(4420,930) 4435,945 4435,2885 4598.86,3048.86 4763.86,3048.86 U13.3@4763.86,2939.69
  Bottom Layer w10: v1(2903,906.03) 2906.03,906.03 2942,942 4408,942 v1(4420,930)
V_SYS: C11.1 C12.1 C13.1 C14.1 C15.1 C16.1 C17.1 C18.1 C26.1 C33.1 J12.1 L4.2 L5.1 R2.2 U7.14 U7.24 U7.34 U7.44 U7.54 U7.64 U7.74 U7.83 U8.2 U10.4 U12.2 | length 1572.6
  Top Layer w12: C11.1@2528.54,1275 2538.54,1285 2606.87,1285 2635,1256.87 U7.64@2674.21,1256.87 ; U10.4@4037.52,790.83 v1(4037.52,845) ; 4122.52,345 L5.1@4122.52,379.84 ; 4192.52,340 L5.1@4192.52,379.84
  Top Layer w15: v1@2528.54,1006.46 C18.1@2528.54,1055 2528.54,1059.64 2673.93,1059.64 U7.74@2674.21,1059.92 ; v1@2528.54,1503.54 C12.1@2528.54,1455 2528.54,1453.81 2674.03,1453.81 U7.54@2674.21,1453.62 ; v1@2803.54,1696.46 C13.1@2850,1696.46 2853.07,1693.39 2853.07,1573.98 U7.44@2853.35,1573.7 ; v1(2815,865) C17.1@2866.46,865 ; C17.1@2870,868.54 2872.75,871.3 2872.75,978.93 U7.83@2873.03,979.21 ; U7.34@3050.2,1573.7 3050,1573.9 C14.1@3050,1686.46 v1@3096.46,1686.46 ; U7.14@3268.7,1296.14 3268.98,1296.42 3306.27,1296.42 3319.85,1310 3391.46,1310 C16.1@3391.46,1300 v1@3391.46,1253.54 ; U7.24@3268.7,1492.99 3268.98,1493.27 3386.46,1493.27 C15.1@3386.46,1495 v1@3386.46,1543.54 ; v1(3378.54,675) L4.2@3378.54,716.5
  other v1: 1255,205 4157.52,300 2530,1005 3390,1245 2580,1285 2530,1505 4340,1525 3385,1545 3100,1690 2800,1700
VBATT: C25.1 C30.1 J8.1 J9.1 R1.1 R8.1 U10.2 U10.3 U13.2 | length 295.7
  Top Layer w12: U10.3@4156.38,789.69 U10.2@4156.38,770 v1(4212.52,770) C25.1@4266.06,770 ; R1.1@4636.06,2170 4640,2166.06 v1(4640,2115)
  Top Layer w13: U13.2@4763.86,2920 v1(4820,2920) C30.1@4873.54,2920
  other v1: 4615,95 4675,95 5595,2425 5660,2425 5830,2425 5890,2425 5750,2485 5750,2560
VCAM1_8: C23.1 J3.10 J16.1 R25.2 U9.5 | length 68.1
  Top Layer w10: J3.10@1638.45,2561.09 J3.10@1638.23,2560.87 1638.45,2560.65 1638.45,2538.2 1655,2521.65 v1(1655,2500)
  other v1: 1962.78,2578.89
VCAM3: C28.1 J3.11 J15.1 L2.2 R26.2 U11.5
VCC_CAP: J11.1
VDDIO: C4.1 U1.1 | length 61.5
  Top Layer w15: U1.1@2445.63,2169.37 C4.1@2445.63,2230.83
VPYRO: C35.1 C36.1 J10.1 J10.3 J10.5 J10.7 R8.2
VRADIO: C8.1 C9.1 C32.1 C51.1 C52.1 J14.1 R7.1 U3.6 U3.8 U3.12 U12.4 U18.7 U18.15 U18.18 | length 459.5
  Top Layer w10: 1046.57,778.82 1046.65,778.74
  Top Layer w12: C52.1@955.24,778.74 U18.18@1009.17,778.74 1046.65,778.74 1046.65,748.74 1061.65,733.74 1111.65,733.74 1136.97,759.06 U18.7@1162.72,759.06 ; 1046.57,778.82 U18.15@1046.57,855.51
  Top Layer w15: U3.6@1084.21,1327.24 1112.24,1327.24 1115,1330 ; U3.8@1112.76,1375.47 1194.53,1375.47 v1(1205,1365)
  other v1: 1250,305 826.65,778.74 1134.69,1303.07
  other v3: 1160,1480
XTAL_1_R: C53.1 U18.10 X1.XTAL_P | length 205.4
  Top Layer w13.68: U18.10@1162.72,818.11 1178.11,818.11 1216.58,856.58 X1.XTAL_P@1258.35,856.58 1271.46,869.69 C53.1@1271.46,945
XTAL_2_R: C54.1 U18.9 X1.XTAL_N | length 320.1
  Top Layer w13.68: U18.9@1162.72,798.43 1201.57,798.43 1225,775 1290,775 1344.96,720.04 X1.XTAL_N@1344.96,710.91 1344.96,628.5 C54.1@1335.2,618.74
pads on no net: J3.22 J3.23 J3.24 J3.25 J3.26 J3.27 J3.28 J8.5 J8.6 J11.2 J11.5 U1.8 U1.15 U2.5 U2.16 U2.17 U3.13 U3.14 U3.15 U3.16 U3.18 U3.24 U3.25 U4.6 U5.4 U5.5 U5.13 U5.14 U5.15 U5.16 U5.17 U5.18 U7.68 U7.82 U7.91 U7.92 U7.98 U8.1 U8.4 U8.5 U8.9 U8.11 U8.12 U8.13 U8.14 U14.5 U14.6 U15.3 U15.4 U15.7 U17.3 U17.5 U17.6 U17.7 U17.14

## Polygon pours and split planes (outlines as drawn)
VRADIO on Top Layer "Mechanical 13-No Net" (solid, pour order 58): 1075,1355.79 1139.21,1355.79 1170,1325 1175,1320 1225,1320 1225,1235 1130,1235 1075,1290
VRADIO on Top Layer "Mechanical 13-No Net" (solid, pour order 55): 1100,1445 1190,1445 1195,1445 1225,1475 1225,1540 1210,1555 1125,1555 1100,1530
AVCC_CAP on Top Layer "Mechanical 13-No Net" (solid, pour order 60): 3050,925 3295,925 3335,965 3335,1105 3435,1105 3435,1045 3435,745 3420,730 3105,730 3025,810 3025,900
GND on Top Layer "Mechanical 13-No Net" (solid, pour order 53): 3885,1825 3885,1715 3775,1715 3760,1730 3760,1810 3760,1820 3765,1825
VBATT on Top Layer "Mechanical 13-No Net" (solid, pour order 98): 5931,2620 5560,2620 5530,2590 5530,2425 5570,2385 5935,2385 5960,2410 5955,2415 5955,2590
GND on Top Layer "Mechanical 13-No Net" (solid, pour order 96): 5940,3035 5570,3035 5530,2995 5530,2820 5530,2815 5570,2775 5935,2775 5960,2800 5960,3005
GND on Top Layer "Mechanical 13-No Net" (solid, pour order 91): 1036.65,743.74 956.65,743.74 956.65,973.74 871.65,973.74 776.65,878.74 776.65,653.74 836.65,593.74 986.65,593.74 1036.65,643.74
GND on Top Layer "Mechanical 13-No Net" (solid, pour order 90): 1056.65,758.74 1056.65,863.74 1096.65,863.74 1171.65,788.74 1171.65,758.74 1141.65,758.74 1121.65,738.74 1116.65,733.74 1061.65,733.74 1054.15,741.24
GND on Top Layer "Mechanical 13-No Net" (solid, pour order 89): 4915,560 5185,560 5210,535 5205,530 5205,320 5205,290 5190,275 5185,270 4950,270 4910,270 4885,295 4885,540
GND on Top Layer "Mechanical 13-No Net" (solid, pour order 88): 4925,1115 5185,1115 5220,1080 5220,1075 5220,835 5185,800 5175,790 4930,790 4900,820 4900,1095
GND on Top Layer "Mechanical 13-No Net" (solid, pour order 86): 4900,1690 5180,1690 5215,1655 5215,1490 5190,1465 4905,1465 4870,1500 4870,1510 4870,1660
GND on Top Layer "Mechanical 13-No Net" (solid, pour order 84): 4920,2220 5190,2220 5215,2195 5215,1935 5200,1920 5190,1910 4910,1910 4905,1910 4885,1930 4885,2190
V_SYS on Top Layer "Mechanical 13-No Net" (solid, pour order 82): 4220,1560 4350,1560 4365,1545 4365,1505 4365,1495 4355,1485 4350,1480 4215,1480
GND on Top Layer "Mechanical 13-No Net" (solid, pour order 80): 685,3065 685,2900 670,2885 370,2885 345,2910 345,3045 395,3095 655,3095
GND on Top Layer "Mechanical 13-No Net" (solid, pour order 79): 1045,2665 1045,2550 1015,2520 945,2520 900,2565 900,2660 900,2665
V_SENS on Top Layer "Mechanical 13-No Net" (solid, pour order 77): 1105,2965 975,2965 975,2835 1070,2835 1080,2835 1135,2890 1135,2935
V_SYS on Top Layer "Mechanical 13-No Net" (solid, pour order 74): 1110,180 1110,250 1390,250 1390,190 1365,165 1110,165
GND on Top Layer "Mechanical 13-No Net" (solid, pour order 73): 1165,245 1165,270 1105,270 1105,465 990,465 965,465 860,360 860,180 1085,180 1100,195 1100,245
VRADIO on Top Layer "Mechanical 13-No Net" (solid, pour order 71): 1335,325 1285,325 1275,335 1135,335 1135,275 1215,275 1230,260 1365,260 1365,295
V_SENS on Top Layer "Mechanical 13-No Net" (solid, pour order 68): 3375,2100 3375,2013.15 3325,1963.15 3290,1963.15 3115,1963.15 3085,1993.15 3085,2098.15 3085,2123.15 3120,2158.15 3316.85,2158.15
GND on Top Layer "Mechanical 13-No Net" (solid, pour order 67): 3003.54,2980 3003.54,3070 3038.54,3105 3188.54,3105 3223.54,3070 3223.54,2955 3183.54,2955 3158.54,2980
V_SENS on Top Layer "Mechanical 13-No Net" (solid, pour order 66): 3008.54,2980 3118.54,2980 3153.54,2945 3153.55,2815 3008.54,2815
GND on Top Layer "Mechanical 13-No Net" (solid, pour order 65): 3178.54,2905 3298.54,2905 3298.54,2845 3298.54,2730 3298.54,2670 3178.54,2670
V_SENS on Top Layer "Mechanical 13-No Net" (solid, pour order 63): 3554.37,2243.74 3554.37,2138.74 3519.37,2138.74 3519.37,2093.74 3564.37,2093.74 3564.37,2088.74 3569.37,2083.74 3623,2083.74 3684.37,2143.62 3685.3,2181.43 3681.04,2192.07 3629.37,2243.74
V_SENS on Top Layer "Mechanical 13-No Net" (solid, pour order 62): 4066.46,2770 3946.46,2770 3951.46,2775 3951.46,2920 4016.46,2920 4066.46,2870
GND on Top Layer "Mechanical 13-No Net" (solid, pour order 61): 3841.46,2970 3776.46,2970 3686.46,2880 3686.46,2785 3746.46,2725 3811.46,2725 3811.46,2735 3876.46,2800 3876.46,2855 3876.46,2860 3861.46,2875 3846.46,2890 3846.46,2900
GND on Top Layer "Mechanical 13-No Net" (solid, pour order 59): 2355,2210 2265,2210 2260,2205 2260,2125 2260,2120 2265,2115 2410,2115 2450,2115 2455,2120 2455,2140 2405,2140 2395,2150
GND on Top Layer "Mechanical 13-No Net" (solid, pour order 56): 2620,2405 2620,2240 2615,2240 2555,2180 2535,2160 2535,2145 2535,2140 2665,2140 2720,2195 2720,2205 2720,2355
V_SENS on Top Layer "Mechanical 13-No Net" (solid, pour order 54): 2500,2405 2605,2405 2605,2245 2545,2185 2510,2185 2510,2210 2500,2220
V_SENS on Top Layer "Top Layer-No Net" (solid, pour order 52): 2101.02,2045.87 2206.02,2045.87 2206.02,1935.87 2186.02,1915.87 2111.02,1915.87 2106.02,1915.87 2096.02,1925.87 2096.02,2035.87
GND on Top Layer "Top Layer-No Net" (solid, pour order 57): 1761.02,2035.87 1916.02,2035.87 1926.02,2025.87 1926.02,1945.87 1886.02,1905.87 1796.02,1905.87 1761.02,1940.87
GND on Top Layer "Top Layer-GND" (solid, pour order 64): 1996.02,2300.87 1971.02,2275.87 1971.02,2225.87 1971.02,2170.87 2136.02,2170.87 2136.02,2220.87 2056.02,2300.87
NetL6_2 on Top Layer "Mechanical 13-No Net" (solid, pour order 69): 4900,2745 4900,2910 4720,2910 4720,2745
GND on Top Layer "Mechanical 13-No Net" (solid, pour order 70): 4595,2640 4535,2640 4535,2945 4615,3025 4910,3025 4910,2955
V_SENS on Top Layer "Mechanical 13-No Net" (solid, pour order 72): 4870,2620 4645,2620 4645,2410 4785,2410 4870,2410
GND on Top Layer "Mechanical 13-No Net" (solid, pour order 75): 4297.52,875 3987.52,875 3922.52,810 3922.52,505 4022.52,505 4107.52,590 4107.52,780 4272.52,780 4297.52,805
NetL5_2 on Top Layer "Mechanical 13-No Net" (solid, pour order 76): 4292.52,595 4102.52,595 4102.52,710 4102.52,760 4292.52,760
V_SYS on Top Layer "Mechanical 13-No Net" (solid, pour order 78): 4052.52,432.52 4052.52,277.48 4075,255 4235,255 4257.52,277.52 4257.52,432.48 4220,470 4090,470
V_SENS on Top Layer "Mechanical 13-No Net" (solid, pour order 81): 2293.03,2627.44 2103.03,2627.44 2103.03,2537.44 2138.03,2502.44 2203.03,2502.44 2263.03,2502.44 2293.03,2532.44
VCAM1_8 on Top Layer "Mechanical 13-No Net" (solid, pour order 83): 1918.03,2687.44 1918.03,2557.44 1988.03,2487.44 2073.03,2487.44 2073.03,2637.44 2068.03,2642.44 2058.03,2652.44 2013.03,2652.44 1978.03,2687.44
VCAM3 on Top Layer "Mechanical 13-No Net" (solid, pour order 85): 2090,2960.03 1930.9,2960.03 1930.9,2830.03 2005.9,2755.03 2090,2755.03
V_SENS on Top Layer "Mechanical 13-No Net" (solid, pour order 87): 2295.9,2905.03 2125.9,2905.03 2120.9,2900.03 2120.9,2830.03 2120.9,2825.03 2165.9,2780.03 2175.9,2780.03 2270.9,2780.03 2295.9,2805.03
PYRO_FET4 on Top Layer "Mechanical 13-No Net" (solid, pour order 93): 5340,2265 5710,2265 5710,2260 6080,1890 6080,1685 5810,1685 5735,1760 5735,1865 5360,1865 5340,1885
PYRO_FET3 on Top Layer "Mechanical 13-No Net" (solid, pour order 94): 5400,1700 5705,1700 5710,1700 5740,1670 5745,1665 5745,1645 6070,1645 6070,1405 5795,1405 5740,1350 5400,1350
PYRO_FET2 on Top Layer "Mechanical 13-No Net" (solid, pour order 95): 5395,1335 5395,865 5400,860 5790,860 5790,1125 6075,1125 6075,1330 6062.93,1335
PYRO_FET1 on Top Layer "Mechanical 13-No Net" (solid, pour order 97): 5380,815 5380,330 5735,330 6070,665 6070,1080 5810,1080 5810,840 5785,815
NetC10_1 on Top Layer "Mechanical 13-No Net" (solid, pour order 100): 1755,2640 1810,2695 1810,2860 1685,2860 1650,2825 1650,2670 1680,2640
VCAM3 on Top Layer "Mechanical 13-No Net" (solid, remove dead copper, pour order 101): 1810,2950 1990,2950 2005,2935 2005.9,2934.1 2005.9,2755.03 1940.03,2755.03 1905,2720 1895,2710 1895,2570 1880,2555 1875,2550 1650,2550 1630,2570 1630,2630 1645,2645 1655,2635 1735,2635 1760,2635 1780,2655 1780,2910
GND on Top Layer "Mechanical 13-No Net" (solid, remove dead copper, pour order 105): 1.84,3251.23 6101.84,3251.23 6101.84,1.23 1.84,1.23
VPYRO on Bottom Layer "Mechanical 13-No Net" (solid, pour order 92): 4370,765 4375,760 4375,500 4565,310 5820,310 6060,550 6060,1725 6060,1735 6045,1750 5830,1750 5825,1750 5790,1715 5785,1710 5785,1600 5005,820 4425,820 4415,810
VBATT on Bottom Layer "Mechanical 13-No Net" (solid, pour order 99): 4545,220 4740,220 4740,70 4730,60 4725,55 4575,55 4570,55 4545,80
GND on Bottom Layer "Mechanical 13-No Net" (solid, pour order 107): 0,3250 6100,3250 6100,0 0,0
VBATT on Power Plane (split plane): 6079.9,20.1 4420.1,20.1 4420.1,345 4419.71,346.95 4418.61,348.61 4150.1,617.11 4150.1,892.89 4205,947.79 4206.11,949.44 4206.25,950.15 4206.95,950.29 4208.61,951.4 4458.61,1201.4 4459.71,1203.05 4460.1,1205 4460.1,2237.89 4522.11,2299.9 4690,2299.9 4691.95,2300.29 4693.61,2301.4 4818.61,2426.4 4819.71,2428.05 4820.1,2430 4820.1,2665 4819.71,2666.95 4818.61,2668.61 4765.1,2722.11 4765.1,3229.9 6079.9,3229.9
VCAM1_8 on Power Plane (split plane): 2019.9,2592.89 2019.9,2492.11 1962.89,2435.1 1622.11,2435.1 1585.1,2472.11 1585.1,2547.89 1677.11,2639.9 1972.89,2639.9
V_SYS on Power Plane (split plane): 4449.9,1207.11 4201.4,958.61 4200.29,956.95 4200.15,956.25 4199.45,956.11 4197.79,955 4141.4,898.61 4140.29,896.95 4139.9,895 4139.9,615 4140.29,613.05 4141.4,611.4 4409.9,342.89 4409.9,20.1 1090.1,20.1 1090.1,137.89 1192.11,239.9 1260,239.9 1261.95,240.29 1263.6,241.39 1508.61,486.4 1509.71,488.05 1510.1,490 1510.1,1814.9 2125,1814.9 2126.95,1815.29 2128.61,1816.4 2247.11,1934.9 4449.9,1934.9
V_SENS on Power Plane (split plane): 4754.9,2720 4755.29,2718.05 4756.4,2716.4 4809.9,2662.89 4809.9,2432.11 4687.89,2310.1 4520,2310.1 4518.05,2309.71 4516.4,2308.61 4451.4,2243.61 4450.29,2241.95 4449.9,2240 4449.9,1945.1 2245,1945.1 2243.05,1944.71 2241.4,1943.61 2122.89,1825.1 20.1,1825.1 20.1,3229.9 4754.9,3229.9
VRADIO on Power Plane (split plane): 1499.9,492.11 1257.89,250.1 1190,250.1 1188.05,249.71 1186.4,248.6 1081.4,143.6 1080.29,141.95 1079.9,140 1079.9,20.1 20.1,20.1 20.1,1814.9 1499.9,1814.9
GND on Ground Plane (split plane): 6079.9,20.1 20.1,20.1 20.1,3229.9 6079.9,3229.9

## Other copper
Top Layer:
  rectangle net V_SENS: 2520,2185 2545,2195
  region net VRADIO: 936.65,793.74 826.65,793.74 826.65,763.74 936.65,763.74
  rectangle net GND: 1761.02,2095.87 1806.02,2115.87
  rectangle net GND: 1816.02,2095.87 1876.02,2110.87
  rectangle net PYRO_FET4: 5455,1885 5515,1970
  rectangle net PYRO_FET4: 5625,2095 5740,2160
  rectangle net PYRO_FET3: 5655,1600 5725,1650
  rectangle net PYRO_FET3: 5475,1370 5525,1435
  rectangle net PYRO_FET2: 5465,1205 5520,1290
  rectangle net PYRO_FET2: 5655,1020 5725,1085
  rectangle net PYRO_FET1: 5475,670 5525,735
  rectangle net PYRO_FET1: 5660,470 5730,525
  rectangle net GND: 655,2880 690,3000
  text "NU AIAA" at 2805,100 h50
Bottom Layer:
  rectangle net GND: 5680,1930 5765,1960
  rectangle net GND: 5685,2045 5765,2080
  rectangle net GND: 4635,1935 4700,1965
  rectangle net GND: 4635,2030 4705,2060
  text "NU AIAA" at 2270,100 h50
Power Plane (plane layer: these items are gaps in the copper):
  lines w10: 0,1820 1730,1820 2125,1820 2245,1940 4455,1940 ; 1085,5 1085,140 1190,245 1210,245 1260,245 1505,490 1505,1820 ; 1965,2645 1975,2645 ; 4201.4,951.4 4145,895 4145,615 4415,345 4415,0 ; 4205,955 4455,1205 4455,2240 4520,2305 4690,2305 4815,2430 4815,2665 4760,2720 4760,3250 ; 1975,2645 2025,2595 2025,2490 1965,2430 1620,2430 1580,2470 1580,2550 1675,2645 1975,2645

## Silkscreen, mask and mechanical layers (free items; w line width, h text height)
Top Overlay:
  text "VCAM3" at 1655,3000 h30
  text "VBATT" at 5115,2925 h30
  text "V_SENS" at 4125,2485 h30
  text "VCAM1_8" at 1780,2375 h30
  text "Globalstar" at 3240,1875 h30
  text "Console" at 2100,1570 h30
  text "NU AIAA" at 60,555 h40
  text "Karman Avionics Main Board" at 60,490 h30
  text "REV A, Nov 2015" at 55,425 h30
  text "V_SYS" at 3650,95 h30
  text "VRADIO" at 630,55 h30
Mechanical 1:
  lines w10: 0,0 0,3250 6100,3250 6100,0 0,0 ; 790,2530 790,2530 ; 945,980 945,980